# EAGLE board board (EAGLE 7.1.0)
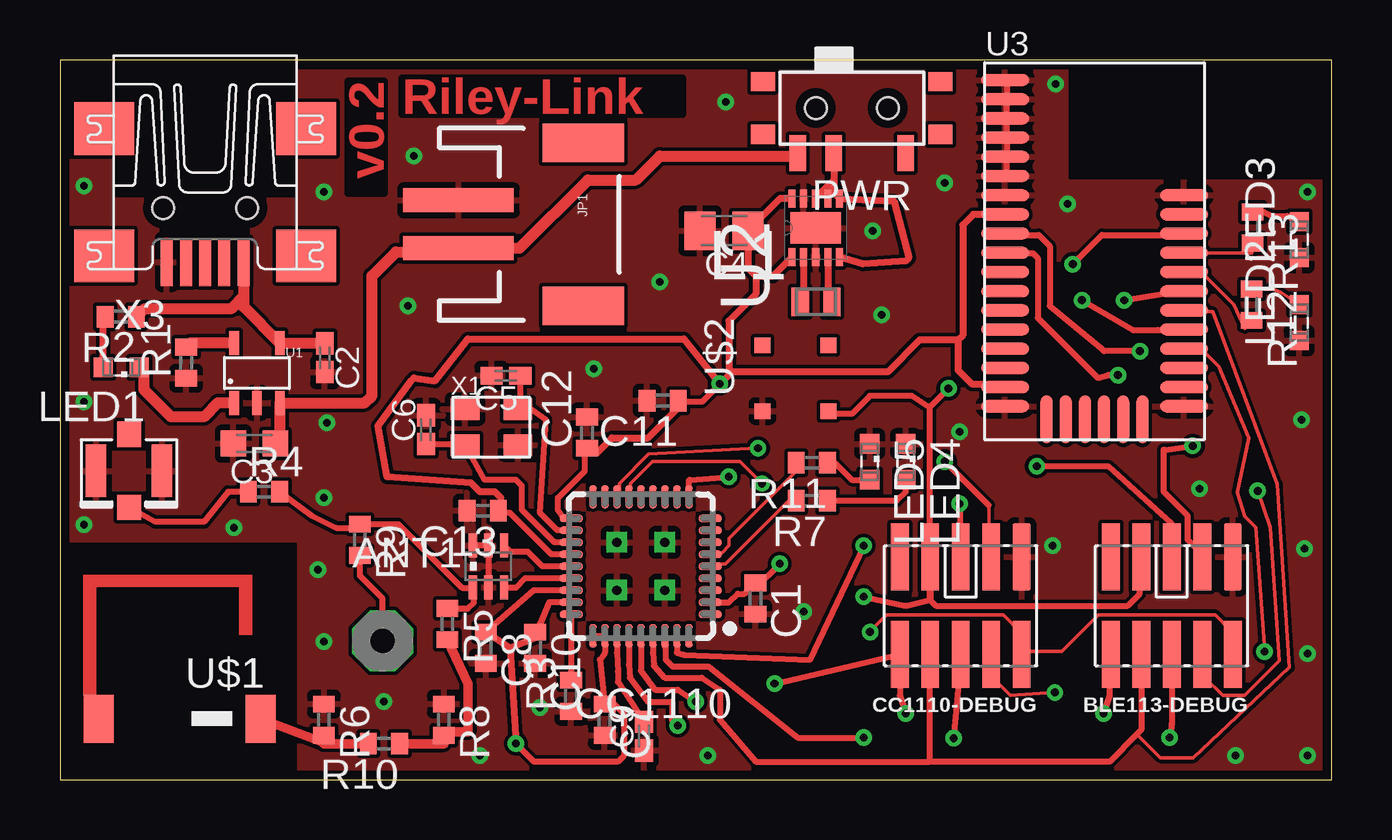
[diagram p0: board, top side]
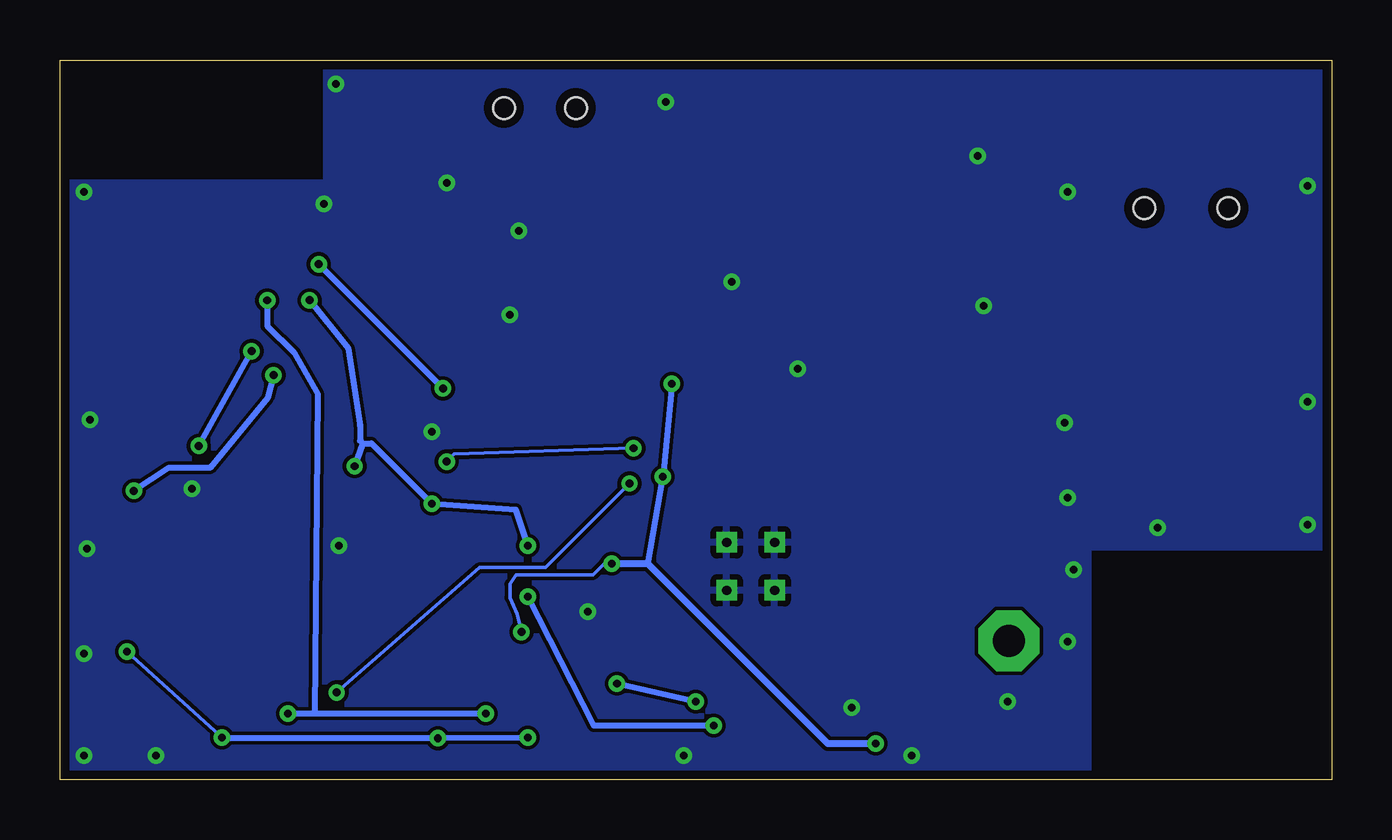
[diagram p1: board, bottom side, seen from below]

Size 53 x 30 mm. Coordinates in mm from the lower left corner, seen from the top.
Outline: 0,0 53,0 53,30 0,30 0,0
Copper layers (1*16): Top 0.0356mm / dielectric 1.5011mm / Bottom 0.0356mm
Design rules "oshpark *": minimum track width 6mil, minimum drill 13mil, track to track 6mil, track to pad 6mil, pad to pad 6mil, via to via 6mil, smd to smd 6mil, copper to edge 15mil, drill to drill 6mil, minimum pad ring 7mil, minimum via ring 7mil, stop-mask expansion 3mil, vias tented up to drill 21mil, thermal gap 10mil

## Footprints (pad centres in the part's own frame; a part is rotated, then mirrored left to right if it is on the bottom)
PAD-01 = drill 1.321 pad 2.54 octagon: 1 0,0
CC-P05 = smd 0.74 x 2.8: 1 -2.54,-2.03; 2 -2.54,2.03; 3 -1.27,-2.03; 4 -1.27,2.03; 5 0,-2.03; 6 0,2.03; 7 1.27,-2.03; 8 1.27,2.03; 9 2.54,-2.03; 10 2.54,2.03
C0402 = smd 0.7 x 0.9: 1 -0.65,0; 2 0.65,0
C0402K = smd 0.925 x 0.74: 1 -0.6,0; 2 0.6,0
C0603K = smd 1.05 x 1.08: 1 -0.875,0; 2 0.875,0
C0805K = smd 1.3 x 1.6: 1 -1,0; 2 1,0
QLP-36_UPDATE = smd 0.95 x 0.3: 1 -2.9,2; 2 -2.9,1.5; 3 -2.9,1; 4 -2.9,0.5; 5 -2.9,0; 6 -2.9,-0.5; 7 -2.9,-1; 8 -2.9,-1.5; 9 -2.9,-2; 19 2.9,-2; 20 2.9,-1.5; 21 2.9,-1; 22 2.9,-0.5; 23 2.9,0; 24 2.9,0.5; 25 2.9,1; 26 2.9,1.5; 27 2.9,2 | smd 0.3 x 0.95: 10 -2,-2.9; 11 -1.5,-2.9; 12 -1,-2.9; 13 -0.5,-2.9; 14 0,-2.9; 15 0.5,-2.9; 16 1,-2.9; 17 1.5,-2.9; 18 2,-2.9; 28 2,2.9; 29 1.5,2.9; 30 1,2.9; 31 0.5,2.9; 32 0,2.9; 33 -0.5,2.9; 34 -1,2.9; 35 -1.5,2.9; 36 -2,2.9 | drill 0.381 pad 0.85 square: 37 -1,1; 38 1,1; 39 -1,-1; 40 1,-1
0915BM15A0001 = smd 0.35 x 1: 1 -0.65,-0.875; 2 0,-0.875; 3 0.65,-0.875; 4 0.65,0.875; 5 0,0.875; 6 -0.65,0.875
U.FL = smd 2.2 x 0.85: P$1 0,1.375; P$2 0,-1.375 | smd 1.05 x 1: P$3 1.525,0; P$4 -1.525,0
JST-2-SMD = smd 1 x 4.6: 1 -1,-3.7; 2 1,-3.7 | smd 1.6 x 3.4: NC1 -3.4,1.5; NC2 3.4,1.5
INDC1610X12N = smd 0.711 x 1.194: 1 -0.66,0; 2 0.66,0
SML0603 = smd 0.8 x 0.8: A 0.75,0; C -0.75,0
SLIDE_SWITCH_SMD = smd 0.7 x 1.5: COM 0.75,1.875; NC 2.25,1.875; NO -2.25,1.875 | smd 1 x 0.8: P$1 -3.7,-1.1; P$2 -3.7,1.1; P$3 3.7,1.1; P$4 3.7,-1.1 | hole 0.9: -1.5,0; 1.5,0
R0402 = smd 0.7 x 0.9: 1 -0.65,0; 2 0.65,0
5PIN_SOT23 = smd 0.4 x 1: P$1 0.4,-0.63; P$2 1.35,-0.63; P$3 2.3,-0.63; P$4 2.3,1.87; P$5 0.4,1.87
SON50P260X260X80-11N = smd 0.762 x 0.305: 1 -1.219,0.991; 2 -1.219,0.508; 3 -1.219,0; 4 -1.219,-0.508; 5 -1.219,-0.991; 6 1.219,-0.991; 7 1.219,-0.508; 8 1.219,0; 9 1.219,0.508; 10 1.219,0.991 | smd 1.295 x 2.108: 11 0,0
BLE113-A = smd 2 x 0.5: AVDD -3.725,1.538; DVDD -3.725,-5.662; GND -3.725,7.138; GND@2 -3.725,6.338; GND@3 -3.725,5.537; GND@4 -3.725,4.737; GND@5 -3.725,3.938; GND@6 -3.725,3.138; GND@7 -3.725,2.337; GND@8 -3.725,-6.463; GND@9 3.725,-6.463; GND@10 3.725,2.337; NC -3.725,-4.862; NC@2 3.725,1.538; P0_0 3.725,-0.062; P0_1 3.725,-0.863; P0_2 3.725,-1.663; P0_3 3.725,-2.462; P0_4 3.725,-3.263; P0_5 3.725,-4.062; P0_6 3.725,-4.862; P0_7 3.725,-5.662; P1_6 -3.725,-2.462; P1_7 -3.725,-1.663; P2_0 -3.725,-0.863; P2_1 -3.725,-0.062; P2_2 -3.725,0.738; RESET 3.725,0.738; SCL -3.725,-3.263; SDA -3.725,-4.062 | smd 0.5 x 2: P1_0 2,-7.013; P1_1 1.2,-7.013; P1_2 0.4,-7.013; P1_3 -0.4,-7.013; P1_4 -1.2,-7.013; P1_5 -2,-7.013
915_ANT = smd 1.25 x 2: P$1 -2.375,0; P$2 4.375,0
PTS540 = smd 0.65 x 0.65: P$1 -1.375,1.375; P$2 1.375,1.375; P$3 -1.375,-1.375; P$4 1.375,-1.375
CTS_32X25 = smd 1.2 x 0.9: 1 -1.1,-0.7; 2 1.1,-0.7; 3 1.1,0.8; 4 -1.1,0.8
UX60-MB-5ST = smd 2 x 0.5: 1 2.25,1.6; 2 2.25,0.8; 3 2.25,0; 4 2.25,-0.8; 5 2.25,-1.6 | smd 2.2 x 2.5: M1 -3.3,-4.2; M2 -3.3,4.2; M3 2,4.2; M4 2,-4.2 | hole 0.9: 0,-1.75; 0,1.75

## Placement (x,y rotation side)
ANT1  [PAD-01]  13.45,5.78 0 top
BLE113-DEBUG  CC-DEBUG-PWR  [CC-P05]  46.34,7.25 180 top
C1  100nF  [C0402]  28.99,7.55 270 top
C2  4.7uF  [C0402K]  11.04,17.59 270 top
C3  4.7uF  [C0603K]  8.1,14.01 180 top
C4  10 uF  [C0805K]  27.68,22.88 180 top
C5  27pF  [C0402K]  18.59,16.84 180 top
C6  27pF  [C0402K]  15.26,14.59 90 top
C7  100nF  [C0402]  22.7,2.5 270 top
C8  100nF  [C0402]  17.75,5.5 270 top
C9  1uF  [C0402K]  24.34,1.81 90 top
C10  100nF  [C0402]  19.8,5.5 270 top
C11  100uF  [C0402]  25.12,15.8 180 top
C12  100nF  [C0402]  21.97,14.46 90 top
C13  100nF  [C0402]  17.62,11.21 180 top
CC1110  CC1110  [QLP-36_UPDATE]  24.21,8.89 180 top
CC1110-DEBUG  CC-DEBUG-PWR  [CC-P05]  37.55,7.25 180 top
IC1  0915BM15A0001  [0915BM15A0001]  17.86,8.89 0 top
J1  U.FL  [U.FL]  2.88,12.88 270 top
JP1  M02-JST-2MM-SMT  [JST-2-SMD]  20.31,23.15 270 top
L1  1.5 uH  [INDC1610X12N]  31.52,19.92 0 top
LED1  [SML0603]  2.55,17.19 180 top
LED2  [SML0603]  51.65,19.05 90 top
LED3  [SML0603]  51.65,22.51 90 top
LED4  [SML0603]  35.25,13.25 270 top
LED5  [SML0603]  33.75,13.25 270 top
PWR  SW_SLIDE  [SLIDE_SWITCH_SMD]  33,28 180 top
R1  2K  [R0402]  5.26,17.38 90 top
R2  330  [R0402]  2.54,19.3 180 top
R3  58kOhm  [R0402]  21.3,3.5 90 top
R4  [R0402]  8.5,12 0 top
R5  [R0402]  16.14,6.49 270 top
R6  [R0402]  11,2.5 270 top
R7  470 ohms  [R0402]  31.34,11.63 180 top
R8  [R0402]  16,2.5 270 top
R9  [R0402]  12.5,10 270 top
R10  [R0402]  13.5,1.5 180 top
R11  470 ohms  [R0402]  31.34,13.21 180 top
R12  470 ohms  [R0402]  49.66,19.8 270 top
R13  470 ohms  [R0402]  49.7,23.01 270 top
U1  [5PIN_SOT23]  6.86,16.33 0 top
U2  TPS63030DSKT  [SON50P260X260X80-11N]  31.5,23 90 top
U3  BLE113-A  [BLE113-A]  43.12,22.02 0 top
U$1  915_ANT  [915_ANT]  5.99,2.54 180 top
U$2  TACTILE_SWITCH  [PTS540]  30.66,16.73 270 top
X1  CTS_32X25_SMD  [CTS_32X25]  17.98,14.64 0 top
X3  MINI-USB-UX60-MB-5ST  [UX60-MB-5ST]  6.05,23.83 270 top

## Library data of the parts
ANT1 = discrete
BLE113-DEBUG CC1110 CC1110-DEBUG IC1 PWR U1 U$1 U$2 = parts
C1-C13 R1-R13 = rcl
J1 = SparkFun-Connectors; PROD_ID: CONN-09193
JP1 = SparkFun-Connectors; PROD_ID: CONN-08352
L1 = Bourns_By_element14_Batch_1; MPN: PM0603-R12J-RC; OC_FARNELL: -; OC_NEWARK: 86K1771; SUPPLIER: BOURNS; TOLERANCE: ±5 %
LED1-LED5 = led
U2 = Texas Instruments_By_element14_Batch_1; MPN: TPS63030DSKT; OC_FARNELL: 1686303; OC_NEWARK: 19P7478; PACKAGE: SON-10; SUPPLIER: Texas Instruments
U3 = sf-bluegiga; ANTENNA: On-module ceramic chip antenna
X1 = cts_crystal
X3 = con-hirose; OC_FARNELL: unknown; OC_NEWARK: unknown

## Nets
DC: CC1110-DEBUG.3 CC1110.16
DC_BLE: BLE113-DEBUG.3 U3.P2_2
DD: CC1110-DEBUG.4 CC1110.15
DD_BLE: BLE113-DEBUG.4 U3.P2_1
GND: BLE113-DEBUG.1 C1.2 C2.2 C3.2 C4.2 C5.2 C6.2 C7.2 C8.2 C9.1 C10.2 C11.2 C12.2 C13.2 CC1110-DEBUG.1 CC1110.37 CC1110.38 CC1110.39 CC1110.40 IC1.2 IC1.5 IC1.6 J1.P$1 J1.P$2 JP1.1 LED2.C LED3.C LED4.C LED5.C R1.1 R3.1 R6.1 R8.1 U1.P$2 U2.3 U2.9 U2.11 U3.GND U3.GND@2 U3.GND@3 U3.GND@4 U3.GND@5 U3.GND@6 U3.GND@7 U3.GND@8 U3.GND@9 U3.GND@10 U$2.P$4 X1.2 X1.4 X3.5
MISO: BLE113-DEBUG.10 CC1110-DEBUG.10 CC1110.32 U3.P0_2
MOSI: BLE113-DEBUG.8 CC1110-DEBUG.8 CC1110.33 U3.P0_3
N$1: L1.1 U2.2
N$2: LED1.C U1.P$1
N$3: R1.2 U1.P$5
N$4: LED1.A R2.2
N$5: CC1110.24 IC1.3
N$6: L1.2 U2.4
N$7: CC1110.23 IC1.4
N$9: J1.P$3 R4.1
N$10: IC1.1 R4.2 R5.1 R9.1
N$11: R5.2 R8.2 R10.1
N$12: ANT1.1 R9.2
N$13: R6.2 R10.2 U$1.P$1
N$14: CC1110.27 R3.2
N$18: C9.2 CC1110.30
N$20: C6.1 CC1110.21 X1.1
N$21: C5.1 CC1110.20 X1.3
N$24: LED4.A R7.1
N$25: LED5.A R11.1
N$29: LED2.A R12.1
N$30: LED3.A R13.1
N$31: R12.2 U3.P0_1
N$32: R13.2 U3.P0_0
P0_0: CC1110.5 R7.2
P0_1: CC1110.6 R11.2
RESET: BLE113-DEBUG.7 CC1110-DEBUG.7 CC1110.31 U3.RESET U$2.P$2
SCK: BLE113-DEBUG.6 CC1110-DEBUG.6 CC1110.34 U3.P0_5
SSN: BLE113-DEBUG.5 CC1110-DEBUG.5 CC1110.35 U3.P0_4
V+: PWR.COM U2.5 U2.6 U2.7 U2.8
VBAT: C3.1 JP1.2 PWR.NC U1.P$3
VDD: BLE113-DEBUG.2 C1.1 C4.1 C7.1 C8.1 C10.1 C11.1 C12.1 C13.1 CC1110-DEBUG.2 CC1110.2 CC1110.10 CC1110.19 CC1110.22 CC1110.25 CC1110.26 CC1110.28 CC1110.29 U2.1 U2.10 U3.AVDD U3.DVDD
VIN_USB: C2.1 R2.1 U1.P$4 X3.1

## Tracks (layer width: path | path; a pad name or v marks a point on that pad's centre or on a via)
DC  (via drill 0.33)
  Top 0.152: v29.09,13.81 24.54,13.56 23.32,12.34 23.32,11.89 CC1110.16 | 38.71,11.43 38.71,9.3 CC1110-DEBUG.3
  Top 0.24: 38.71,11.43 v36.88,13.26
  Bottom 0.152: v29.09,13.81 36.58,13.56 v36.88,13.26
DC_BLE  (via drill 0.33)
  Top 0.152: 40.08,22.71 39.47,22.71 U3.P2_2 | 47.55,9.3 BLE113-DEBUG.3
  Top 0.24: 47.55,9.3 47.55,9.45 47,10 47,11 46,12 46,13.75 46.06,13.75 v47.22,13.91 | 40.08,22.71 40.79,22.71 41.25,22.25 41.25,19.75 43.38,18
  Top 0.254: v45.01,17.86 43.51,17.86 43.38,18
  Bottom 0.24: v47.22,13.91 v45.01,17.86
DD  (via drill 0.33)
  Top 0.152: v29.26,12.34 28.35,13.26 24.69,13.26 23.77,12.34 23.77,11.89 CC1110.15 | v41.47,3.63 39.62,3.5 38.86,4.27 38.86,5.18 CC1110-DEBUG.4
  Bottom 0.152: v29.26,12.34 32.77,8.84 35.51,8.84 v41.47,3.63
DD_BLE  (via drill 0.33)
  Top 0.152: 40.08,21.95 39.47,21.95 U3.P2_1 | v49.92,12.04 50.44,10.52 50.82,4.95 49.38,3.5 48.46,3.5 47.7,4.27 47.7,5.18 BLE113-DEBUG.4
  Top 0.24: 40.08,21.95 40.55,21.95 40.75,21.75 40.75,19.25 43.25,16.75 43.71,16.88 v44.1,16.86
  Bottom 0.24: v44.1,16.86 44.35,15.9 46.75,13 48.46,13 v49.92,12.04
GND  (via drill 0.33, 0.33 pad 0.41)
  Top 0.152: 39.47,28.5 U3.GND@2 39.47,28.35 | 39.47,29.11 U3.GND | 39.47,26.06 U3.GND@5 39.47,25.91 | 39.47,26.67 U3.GND@4 39.47,26.82 | 39.47,27.43 U3.GND@3 39.47,27.58 | 39.47,25.3 U3.GND@6
  Top 0.24: 39.47,29.11 39.47,28.5 | 39.47,26.67 39.47,26.06 | 39.47,26.82 39.47,27.43 | 39.47,27.58 39.47,28.35 | 39.47,25.3 39.47,25.91
  Top 0.26: C10.2 20,5 | IC1.2 IC1.5 IC1.6
  other vias: 10.75,8.75 11,24.5 25,20.75 27.75,28.25 33.88,22.88 52,24.5 51.75,15 51.88,9.62 52,5.25 52,1 49,1 41.38,9.75 22.25,17.12 11.12,14.88 14.5,19.75 11,5.75 13.5,3.25 17.5,1 11,11.75 41.5,29 14.75,26 42,24 31,7 20,3 27,1 47.5,12.12 37.5,14.5 34.25,19.38 1,10.62 7.25,10.5 1,15.75 1,24.75 36.88,24.88
  pour Bottom: 0,30 53,30 53,0 0,0
  pour Top: 10,0 10,10 0,10 0,30 53,30 53,0
MISO  (via drill 0.33)
  Top 0.152: 46.02,20.27 46.79,20.27 U3.P0_2
  Top 0.24: CC1110.32 24.21,4.54 24.8,3.75 25.75,3.75 v26.5,3.25 | v29.79,4 CC1110-DEBUG.10 35.01,3.5 v35.25,2.75 | v43.5,2.75 43.75,3.5 43.75,5.17 BLE113-DEBUG.10 | v44.36,19.98 46.02,20.27
  Bottom 0.152: 42.37,2.74 42.37,2.75
  Bottom 0.24: v26.5,3.25 v29.79,4 | v35.25,2.75 42.37,2.75 | 42.37,2.75 v43.5,2.75 | 42.37,2.75 42.24,16.05 43.25,17.8
  Bottom 0.254: v44.36,19.98 44.36,18.91 43.25,17.8
MOSI
  Top 0.152: 44.89,1.89 45.87,0.91 47.24,0.91 51.25,4.67 50.75,12.31 48.05,19.51 46.94,19.51 U3.P0_3
  Top 0.24: CC1110.33 24.71,5.29 24.75,4.75 25.2,4.25 26.75,4.25 27.5,3.75 27.5,2.5 29,0.75 36.25,0.75 | 36.25,0.75 36.25,4.45 CC1110-DEBUG.8 | BLE113-DEBUG.8 45.07,2.07 44.89,1.89 43.75,0.75 36.25,0.75
N$1
  Top 0.24: 30.99,20.06 L1.1
  Top 0.3: U2.2 30.99,20.06
N$2
  Top 0.45: U1.P$1 6.58,15.7 6,15.12 4.62,15.12 3.5,16.25 3.5,16.99 LED1.C
N$3
  Top 0.45: U1.P$5 5.43,18.2 R1.2
N$4
  Top 0.3: LED1.A 1.8,19.21 R2.2
N$5
  Top 0.26: CC1110.24 19.39,8.39 19,8 18.52,8 IC1.3
N$6
  Top 0.24: U2.4 32.01,21.99 32,22 | 32,20.09 L1.2
  Top 0.3: 32,22 32,20.09
N$7
  Top 0.26: CC1110.23 20.11,8.89 19.5,9.5 18.77,9.5 IC1.4
N$9
  Top 0.25: R4.1 7,12 6,10.75 3.98,10.75 J1.P$3
N$10
  Top 0.24: R5.1 17.01,7.13 17.25,7.38 17.25,7.97 IC1.1 17.2,8 16.75,8 14.1,10.65 R9.1
  Top 0.26: R4.2 10.5,11 11.5,10.5 12.35,10.5 R9.1
N$11
  Top 0.26: 16.15,2 R8.2
  Top 0.4: R10.1 16,1.5 | R5.2 17,4 17,2 16.15,2
  Top 0.406: 16,1.5 R8.2
N$12
  Top 0.26: ANT1.1 13.45,7.55 12.5,8.5 R9.2
N$13
  Top 0.4: U$1.P$1 11,1.54 | R10.2 11,1.5
  Top 0.406: 11,1.54 R6.2 11,1.5
N$14
  Top 0.26: CC1110.27 21.31,5 R3.2
N$18
  Top 0.26: CC1110.30 23.21,5.29 23.25,4.5 23.25,4.07 C9.2
N$20
  Top 0.24: CC1110.21 20.61,9.89 19.25,11.25 19.25,12.25 19,12.5 17.7,12.5 X1.1 16.84,13.98 C6.1
N$21
  Top 0.24: CC1110.20 20.73,10.39 20,11.12 20.25,15 19.38,15.62 19,15.62 19.08,15.54 19.18,15.54 | C5.1 19.18,15.54 | 19.18,15.54 X1.3
N$24
  Top 0.24: R7.1 34.88,11.63 35.25,12 LED4.A
N$25
  Top 0.24: R11.1 32.3,13.21 33,12.5 LED5.A
N$29
  Top 0.152: LED2.A 50.9,20.3 50.54,20.44 R12.1
N$30
  Top 0.24: R13.1 50.16,23.66 50.5,23.5 51.14,23.5 LED3.A
N$31
  Top 0.152: R12.2 49.39,18.81 48.92,19.81 47.7,21.03 46.94,21.03 U3.P0_1
N$32
  Top 0.152: R13.2 49.68,21.95 46.94,21.95 U3.P0_0
P0_0
  Top 0.152: R7.2 30.63,11.58 30.33,11.58 27.74,8.99 27.13,8.99 CC1110.5
P0_1
  Top 0.152: R11.2 30.63,13.11 30.63,12.8 27.89,10.06 27.89,9.75 27.58,9.45 27.13,9.45 CC1110.6
RESET  (via drill 0.33)
  Top 0.152: 46.79,22.71 U3.RESET | 36.27,15.54 36.25,15.5
  Top 0.24: CC1110.31 23.71,4.79 23.75,4.25 24.5,3.25 25.5,3.25 25.5,2.5 v25.75,2.25 | v33.5,7.62 35.25,7.25 36.25,7.5 36.25,8.64 | 36.25,8.64 CC1110-DEBUG.7 36.27,7.47 36.5,7.25 44.5,7.25 45,7.75 45,8.46 BLE113-DEBUG.7 | 36.25,8.64 36.25,15.5 35.5,16 33.75,16 33,15.25 32.14,15.25 U$2.P$2 | 46.79,22.71 43.43,22.71 v42.22,21.49 | 36.27,15.54 v37.03,16.31
  Bottom 0.24: v25.75,2.25 30.75,2.25 v33.5,7.62 | v37.03,16.31 v42.22,21.49
SCK  (via drill 0.33)
  Top 0.152: v50.21,5.33 49.84,10.52 49.38,10.97 49.07,11.97 49.56,14.23 48.31,17.22 47.7,17.83 46.94,17.83 U3.P0_5
  Top 0.24: 25.21,5.54 CC1110.34 25.25,5.95 25.25,5 25.55,4.7 27.05,4.7 30.75,1.75 v33.5,1.75 | v37.25,1.72 37.5,4.42 CC1110-DEBUG.6 | BLE113-DEBUG.6 46.34,2.34 v46.25,1.75
  Bottom 0.152: v50.21,5.33 46.33,1.83 v46.25,1.75
  Bottom 0.24: v33.5,1.75 v37.25,1.72 37.47,1.75 v46.25,1.75
SSN  (via drill 0.33)
  Top 0.152: 46.79,18.75 U3.P0_4 | 46.33,10.67 46.33,9.3 BLE113-DEBUG.5
  Top 0.24: CC1110.35 25.71,5.29 26,5.2 31.25,5 v33.5,9.75 | v37.5,11.5 37.5,8.57 CC1110-DEBUG.5 | 46.33,10.67 43.68,13.06 v40.72,13.06 | v42.6,19.98 44.73,18.73 45.75,18.75 U3.P0_4
  Bottom 0.152: 37.64,11.58 v37.5,11.5
  Bottom 0.24: v33.5,9.75 34,11.25 v37.5,11.5 40.02,14.02 40.39,14.02 | 40.39,14.02 v40.72,13.06 | v42.6,19.98 40.98,17.98 40.5,14.75 40.5,14.13 40.39,14.02
V+
  Top 0.3: PWR.COM 32.25,25 | 32.25,25 32.25,24.46 U2.6 32.53,24.22 34.75,24.12 35.38,21.75 35.25,21.62 33.46,21.5 U2.5 | U2.8 31.5,24.25 32.01,24.76 | 32.01,24.76 32.25,25 | U2.7 32.01,24.76
VBAT
  Top 0.3: 30.62,26 PWR.NC
  Top 0.45: C3.1 9.16,14.19 U1.P$3 12.7,15.7 13,16 13,21 14,22 16.46,22 JP1.2 19.15,22.15 22,25 24,25 25,26 30.62,26
VDD  (via drill 0.33)
  Top 0.152: BLE113-DEBUG.2 48.77,5.33 48.77,6.25 48.16,6.86 43.28,6.86 41.76,5.33 40.23,5.33 CC1110-DEBUG.2 40.08,5.33 40.08,6.1 39.32,6.86 34.44,6.86 34.14,6.55 v33.76,6.15 | 38.56,16.46 39.32,16.46 U3.DVDD | C11.1 25.76,15.85 25.76,15.75
  Top 0.24: v30,9 28.95,7.95 C1.1 28.54,7.75 28.25,7.75 27.89,7.39 CC1110.2 | 23.5,2.75 23.5,1 23.25,0.75 19.75,0.75 v19,1.5 | v27.5,16.5 26.75,15.75 25.76,15.75 25.75,15.75 | CC1110.10 26.21,12.46 26.25,12.5 v27.88,12.62 | CC1110.19 21.02,10.89 20.75,11.25 20.75,11.75 21.88,12.88 21.88,13.62 21.88,13.71 C12.1 | CC1110.22 20.48,9.39 18.75,11.12 18.36,11.12 | 18.36,11.12 C13.1 | 18.38,11.75 18.38,11.25 18.36,11.23 18.36,11.12 | 14.62,16.62 14.75,16.75
  Top 0.26: CC1110.25 19.74,7.89 C8.1 18,6 | CC1110.26 20.39,7.39 20,6.5 C10.1 20,6 | CC1110.28 CC1110.29 22.71,5.29 22.5,5 C7.1 23,3.25 23.5,2.75
  Top 0.3: 18,6 18.75,5.5 | 20,6 18.75,5.5 | 18.75,5.5 v19,1.5 | 18.38,11.75 18.12,12 17.5,12 17.12,12.38 13.62,12.62 13.25,14.75 14.62,16.62 | 14.75,16.75 15.62,16.62 17,18.38 26,18.38 v27.5,16.5 27.88,16.88 | U2.10 30.02,24.22 C4.1 28.68,21.32 29,21 | 29,21 29.73,21 U2.1 | 29,21 29,20.25 27.88,19.12 27.88,16.88 | 37.44,18.32 35.82,18.32 34.5,17 28,17 27.88,16.88 | 37.44,18.32 37.44,17.06 38,16.5 38.52,16.5 38.56,16.46 | U3.AVDD 38.06,23.56 37.62,23.12 37.62,18.51 37.44,18.32 | 21.88,13.62 22.38,13.62 23,14.25 24.5,14.25 25.88,15.62 25.76,15.74 25.76,15.75
  Bottom 0.152: v33.76,6.15 33.94,6.9 34.25,7.58 34.25,8.15 33.98,8.53 30.79,8.53 30.33,8.99 30.02,8.99 v30,9
  Bottom 0.24: v27.5,16.5 v27.88,12.62
  Bottom 0.26: 28.5,9 v27.88,12.62
  Bottom 0.3: v19,1.5 21,1.5 28.5,9 v30,9
VIN_USB
  Top 0.45: C2.1 11.03,18.2 U1.P$4 7.65,19.71 X3.1 7.65,20.15 7.12,19.62 3.52,19.62 R2.1

## Text on the board
Top: v0.2 | Riley-Link